# Altium PCB Science_Board_PCB.PcbDoc (part 2 of 2)
Units mil, origin at the board's own origin, x right, y up, seen from the top; angles counter-clockwise.
Board outline 6000 x 3000 mil, 4 copper layers (Top Layer, Mid Layer 1, Mid Layer 2, Bottom Layer), stack 78.937 mil thick; 225 components, 114 nets, 687 pads, 119 vias.
Unrouted connection lines stored in the file: 2.
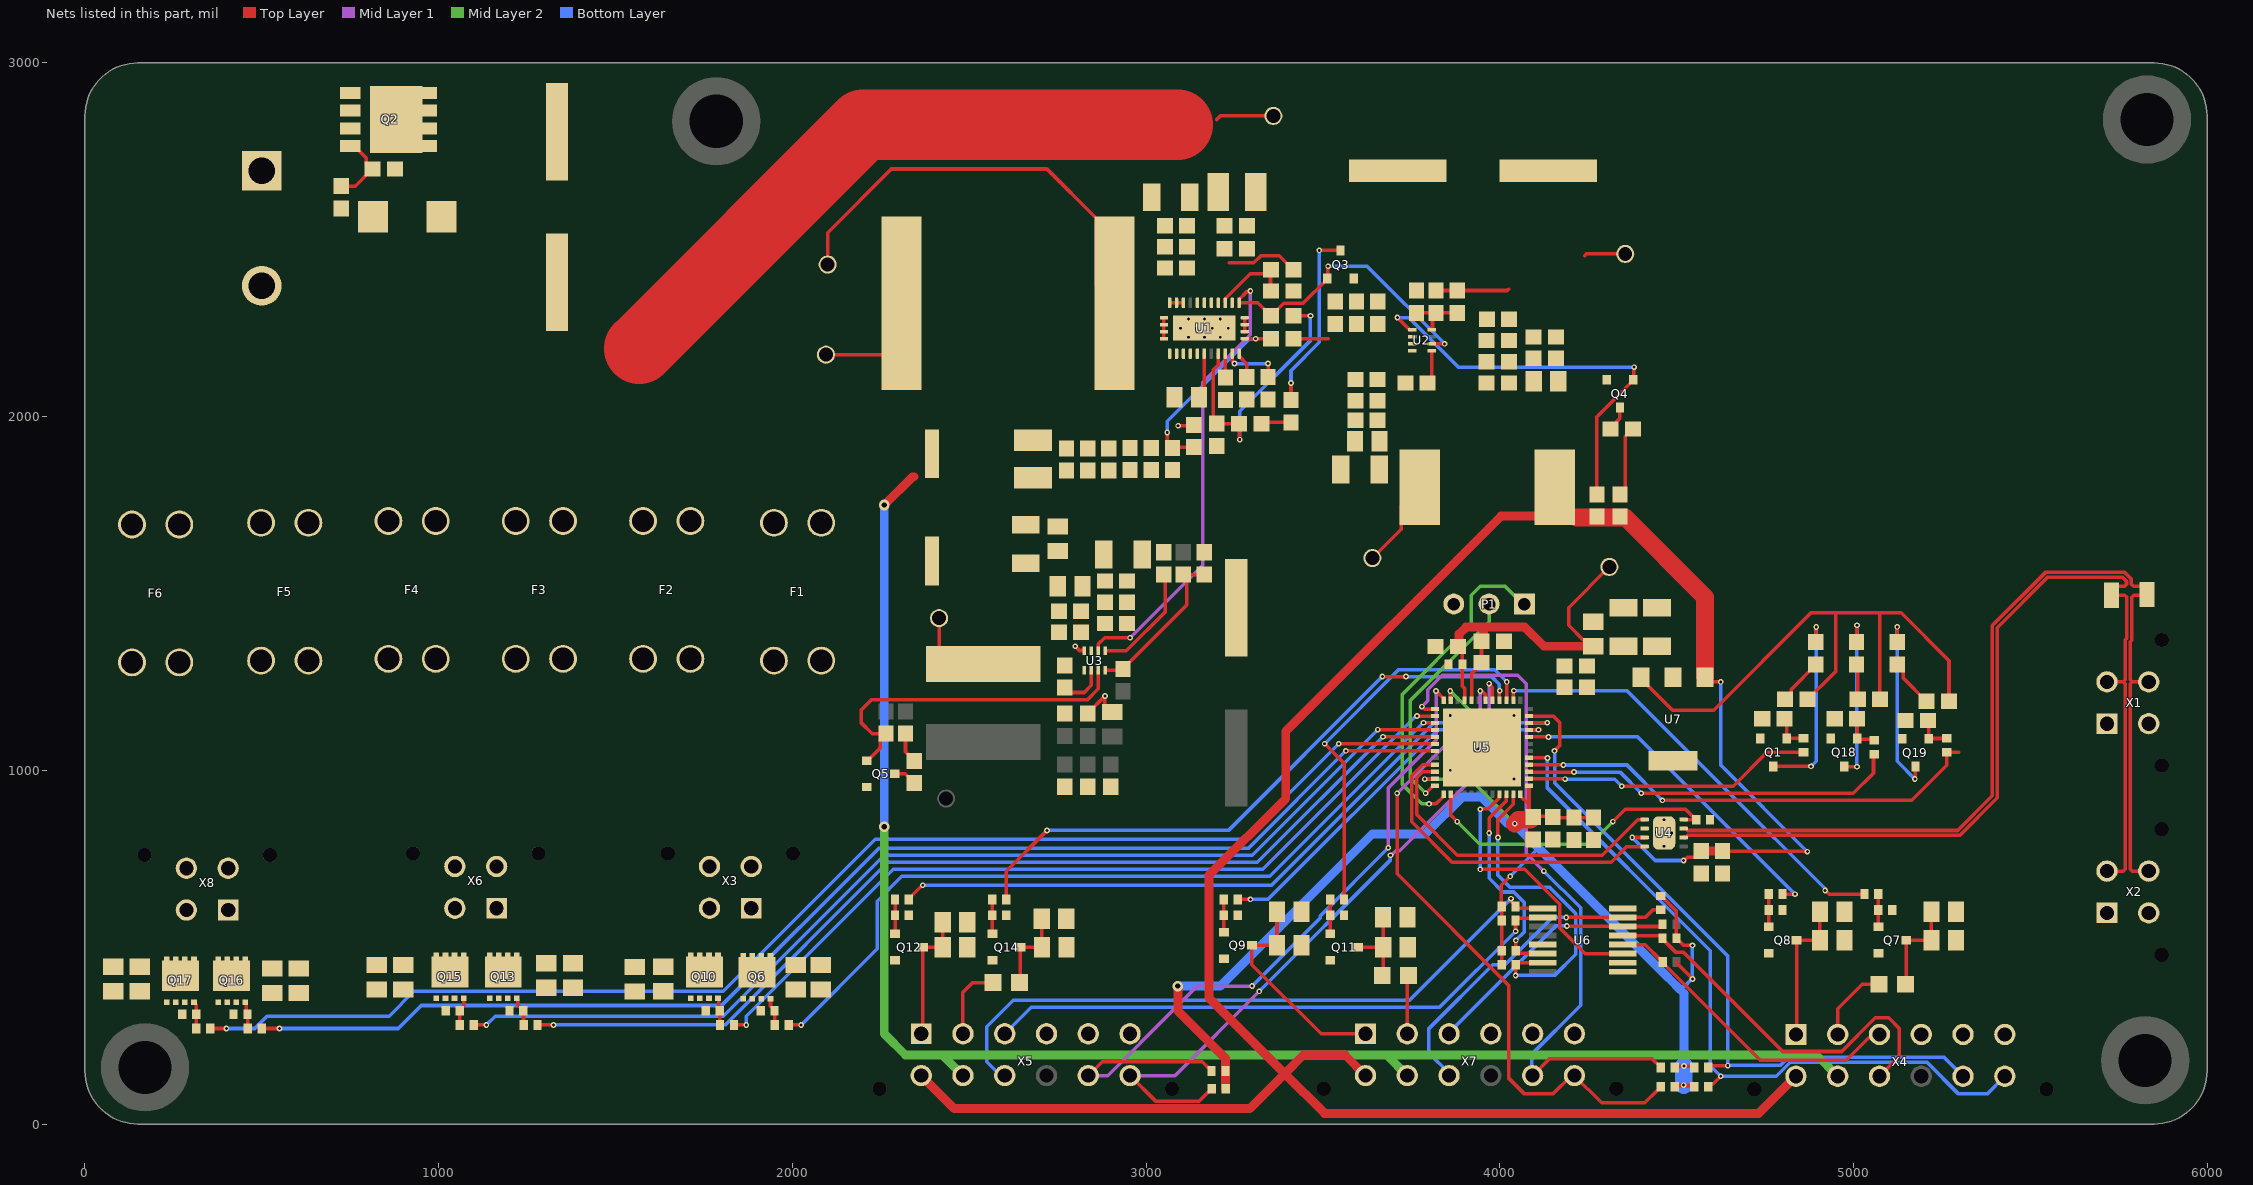
[diagram p4: the nets of this part, all layers, seen from the top]

## Via types
v1: diameter 16, hole 8, Top Layer to Bottom Layer, 101 vias
v2: diameter 11.81, hole 7.87, Top Layer to Bottom Layer, 14 vias
v3: diameter 30, hole 15, Top Layer to Bottom Layer, 4 vias

## Nets (pads, with @x,y where several pads share a name; then routed paths per layer and width w, separated by ;. In a path a pad name is that pad's centre, name@x,y a point inside that pad or via, vN(x,y) a via of type N, cw(c..) or ccw(c..) an arc to the next point about the centre after c; other vN are vias at no path point) (continued)
5V: C41.1 C42.1 C43.1 C44.1 C45.1 C46.1 C47.1 C48.1 C59.1 C60.1 C69.1 L2.2 R15.1 R17.2 R19.1 TP4.1 U4.3 U7.1 X4.P$7 X5.P$7 X7.P$7 | length 7250.4
  Top Layer w10: C41.1@3820,2356.5 R19.1@3880,2356.5 4021.5,2356.5 4025,2360 ; 4240,2455 4245,2460 TP4.1@4355,2460 ; v1(4375,810) U4.3@4409.76,810 ; v1(4520,745) 4521.62,745 4530.48,753.86 4553.35,753.86 4570,770.51 C59.1@4570,771.5 ; U7.1@4580.55,1263.11 4593.66,1250 v1(4625,1250) ; C60.1@4630,771.5 v1@4870,771.5
  Top Layer w25: X5.P$7@2364.44,136.89 2457.87,43.46 3293.46,43.46 3392.5,142.5 ; X7.P$7@3620.66,136.89 3562.55,195 3445,195 3392.5,142.5 ; L2.2@4123.86,1718.7 4003.7,1718.7 3395,1110 3395,920 3177.85,702.85 3177.85,357.15 3392.5,142.5 ; C59.1@4570,771.5 C60.1@4630,771.5 ; X4.P$7@4837.55,135 4732.55,30 3505,30 3392.5,142.5
  Top Layer w50: 4217.32,1715 4355,1715 4580.55,1489.45 U7.1@4580.55,1263.11
  Bottom Layer w10: v1(4375,810) 4440,745 v1(4520,745) ; v1(4625,1250) 4625,1015 v1(4870,770)
12V_5A_BOOT: C19.2 U1.6 | length 129.5
  Top Layer w10: C19.2@3149.65,2055 3165,2070.35 U1.6@3165,2178.15
12V_5A_FB: C20.2 R9.2 R11.1 U1.12 | length 593.4
  Top Layer w10: v1(3060,1955) 3060,1926.5 R9.2@3075,1911.5 3077.01,1913.5 R11.1@3135,1913.5 R11.1@3151.65,1896.85 ; U1.12@3279.17,2220.47 3279.25,2220.39 3309.61,2220.39 v1(3310,2220) C20.2@3360,2220
  Bottom Layer w10: v1(3060,1955) 3060,1986.65 3292.2,2218.85 3308.85,2218.85 v1(3310,2220)
12V_5A_MAIN: C1.1 C2.1 C3.1 C4.2 C5.1 C6.1 C7.1 C8.2 C9.1 C11.1 C12.1 C13.1 C14.1 C15.1 C16.1 C17.1 C18.1 C20.1 C33.1 C34.1 C35.1 C36.1 C37.1 C38.1 C39.1 L1.2 R9.1 TP1.1 U2.2 U3.3 X4.P$8 X5.P$8 X7.P$8 | length 4950.9
  Top Layer w10: TP1.1@2095,2175 2257.52,2175 2309.11,2226.59 L1.2@2309.11,2320 ; C20.1@3416.5,2220 3515,2220
  Top Layer w25: v3(2260,1750) 2340,1830 2345,1830
  Mid Layer 2 w10: 2260,255 2261.62,253.38
  Mid Layer 2 w25: 2260,255 v3(2260,840) ; 2261.62,253.38 2320,195 2424.44,195 ; X5.P$8@2482.55,136.89 2424.44,195 ; X7.P$8@3738.77,136.89 3680.66,195 ; X4.P$8@4955.66,135 4895.66,195 3680.66,195 ; 2424.44,195 3680.66,195
  Bottom Layer w10: v3(2260,840) v3@2260.81,840.81
  Bottom Layer w25: v3(2260,1750) 2260,841.62 v3@2260.81,840.81
12V_5A_OUT: C30.1 U1.9 | length 68.5
  Top Layer w10: U1.9@3224.06,2178.15 3224.06,2110.94 C30.1@3225,2110
12V_5A_PG: Q3.1 R10.1 U1.16 U2.6 U3.2 | length 2091
  Top Layer w10: U3.2@2865.32,1337.56 2865.32,1356.88 2883.43,1375 v1(2955,1375) ; v1(3295,2355) 3293.85,2353.85 3285.74,2353.85 3263.43,2331.54 U1.16@3263.43,2321.85 3315.67,2321.85 3352.52,2285 R10.1@3353.5,2285 3354.49,2285 3389.49,2320 3443.94,2320 3512.6,2388.66 Q3.1@3512.6,2390.63 3513.85,2391.88 3513.85,2423.85 v1(3515,2425) ; U2.6@3807.56,2205.63 v1(3844.37,2205.63) v1@3845,2205
  Mid Layer 1 w10: v1(2955,1375) 3160,1580 3160,2096.65 3295,2231.65 v1(3295,2355)
  Bottom Layer w10: v1(3515,2425) 3625,2425 v1(3844.37,2205.63)
12V_5A_SW: C19.1 L1.1 TP3.1 U1.1 U1.2 U1.3 U1.4 U1.5 | length 1243.6
  Top Layer w10: TP3.1@2100,2430 2100,2520 2280,2700 2720,2700 2859.29,2560.71 2859.29,2371.59 L1.1@2910.89,2320
12V_5A_VCC: C21.1 R8.1 R10.2 U1.8 | length 798.5
  Top Layer w10: U1.8@3204.37,2178.15 3204.37,2146.39 3190,2132.02 3190,1990 C21.1@3200,1980 R8.1@3263.5,1980 3263.5,1936.5 v1(3265,1935) ; R10.2@3416.5,2285 3416.83,2284.67 v1@3465,2284.67
  Bottom Layer w10: v1(3265,1935) 3265,2015 3465,2215 v1@3465,2284.67
  other v1: 3465,2285
BST_3V3_BUCK: C50.1 U3.6 | length 131.6
  Top Layer w10: C50.1@2770,1233.5 2783.5,1220 2825,1220 2845.63,1240.63 U3.6@2845.63,1282.44
BST_5V_BUCK: C40.1 U2.5 | length 95.5
  Top Layer w10: C40.1@3796.5,2095 3807.56,2106.06 U2.5@3807.56,2185.94
CAN_N: R30.1 U4.6 X1.P$2 X2.P$2 | length 2834.1
  Top Layer w10: U4.6@4520,810 4525.91,810 4531.7,815.8 5300.59,815.8 5406.77,921.97 5406.77,1403.46 5548.74,1545.43 5761.02,1545.43 5772.15,1534.3 5772.15,1526.02 5766.3,1520.16 5745.47,1520.16 5729.8,1504.49 R30.1@5729.8,1495 5767.49,1495 5773.35,1489.14 5773.35,1373.5 5768.94,1369.1 5768.94,1255.86 5763.09,1250 ; X2.P$2@5716.89,715 5763.09,715 5768.94,720.86 5768.94,1244.14 5763.09,1250 ; X1.P$2@5716.89,1250 5763.09,1250
CAN_P: R30.2 U4.7 X1.P$4 X2.P$4 | length 2857.3
  Top Layer w10: U4.7@4520,835.59 4525.91,835.59 4531.7,829.8 5294.8,829.8 5392.77,927.77 5392.77,1409.26 5542.95,1559.43 5766.82,1559.43 5786.15,1540.1 5786.15,1526.02 5792.01,1520.16 5814.53,1520.16 5830.2,1504.49 R30.2@5830.2,1496.69 5828.51,1495 5793.21,1495 5787.35,1489.14 5787.35,1367.7 5782.94,1363.3 5782.94,1255.86 5788.8,1250 ; X2.P$4@5835,715 5788.8,715 5782.94,720.86 5782.94,1244.14 5788.8,1250 ; X1.P$4@5835,1250 5788.8,1250
CAN_STB: R29.2 U4.8 U5.38 | length 875
  Top Layer w10: U5.38@3861.42,931.93 3861.42,873.58 v1(3880,855) ; v1(4320,855) 4355,890 4525.31,890 4546.54,868.78 4548.5,868.78 4554.72,862.56 4554.72,860.59 4520.59,860.59 U4.8@4520,861.18
  Mid Layer 2 w10: v1(3880,855) 3943.84,791.16 4256.16,791.16 v1(4320,855)
DEBUG_LED_0: R56.1 U5.2 | length 824.4
  Top Layer w10: U5.2@4082.87,976.22 4083.48,975.61 4184.39,975.61 v1(4185,975) ; v1(4345,955) 4660,955 4755.89,1050.89 R56.1@4858.8,1050.89
  Bottom Layer w10: v1(4185,975) 4325,975 v1(4345,955)
DEBUG_LED_1: R57.1 U5.3 | length 1078.7
  Top Layer w10: U5.3@4082.87,995.91 4083.78,995 v1(4210,995) ; v1(4400,935) 5000,935 5056.83,991.83 5056.83,1045.89 R57.1@5058.8,1045.89
  Bottom Layer w10: v1(4210,995) 4340,995 v1(4400,935)
DEBUG_LED_2: R58.1 U5.4 | length 1335.3
  Top Layer w10: U5.4@4082.87,1015.59 4179.41,1015.59 v1(4180,1015) ; v1(4460,915) 5165,915 5263.8,1013.8 R58.1@5263.8,1050.89 5298.48,1050.89
  Bottom Layer w10: v1(4180,1015) 4360,1015 v1(4460,915)
FB_3V3_BUCK: C51.2 R25.2 R26.1 U3.8 | length 453.2
  Top Layer w10: U3.8@2885,1282.44 2930.94,1282.44 C51.2@2935,1286.5 2935,1287.48 3115,1467.48 3115,1553.5 R26.1@3175,1553.5
FB_5V_BUCK: C41.2 R19.2 R20.1 U2.8 | length 165.9
  Top Layer w10: R20.1@3755,2293.5 C41.2@3810,2293.5 ; U2.8@3807.56,2245 3809.92,2245 3810,2245.08 C41.2@3810,2293.5 ; R19.2@3870,2293.5 C41.2@3810,2293.5
FDCAN_RX: U4.4 U5.33 | length 933.6
  Top Layer w10: U5.33@3817.13,1015.59 3782.34,1015.59 3751,984.25 3751,854.2 3865.2,740 4315,740 4359.41,784.41 U4.4@4409.76,784.41
FDCAN_TX: U4.1 U5.34 | length 897.1
  Top Layer w10: U5.34@3817.13,995.91 3782.45,995.91 3765,978.45 3765,875 3880,760 4290,760 4390.28,860.28 4408.86,860.28 U4.1@4409.76,861.18
GND: C1.2 C2.2 C3.2 C4.1 C5.2 C6.2 C7.2 C8.1 C9.2 C11.2 C12.2 C13.2 C14.2 C15.2 C16.2 C17.2 C18.2 C21.2 C22.2 C23.2 C24.2 C25.2 C26.2 C27.2 C28.2 C29.2 C30.2 C31.2 C33.2 C34.2 C35.2 C36.2 C37.2 C38.2 C39.2 C42.2 C43.2 C44.2 C45.2 C46.2 C47.2 C48.2 C52.2 C53.2 C54.2 C55.2 C56.2 C57.2 C58.2 C59.2 C60.2 C61.2 C62.2 C63.2 C64.2 C65.2 C66.2 C67.2 C68.2 C69.2 C70.2 C71.2 C72.2 C73.1 C74.2 C75.2 C76.2 C77.2 C78.2 C79.2 C80.2 C81.2 C82.2 C83.2 C84.2 C85.2 C86.2 C87.2 C88.2 C89.2 C90.2 C91.2 C92.2 C93.2 C94.2 C95.2 C96.2 C97.2 C98.2 D2.2 P1.3 Q1.2 Q2.3 Q3.2 Q4.2 Q5.2 Q6.2 Q7.2 Q8.2 Q9.2 Q10.2 Q11.2 Q12.2 Q13.2 Q14.2 Q15.2 Q16.2 Q17.2 Q18.2 Q19.2 R3.2 R7.1 R11.2 R13.1 R14.2 R20.2 R26.2 R29.1 R34.2 R35.2 R36.2 R40.2 R41.2 R42.2 R45.2 R47.2 R48.2 R50.2 R52.2 R54.2 R59.2 R60.2 R61.2 U1.13 U1.14 U1.15 U1.17 U1.19 U1.24 U1.25 U1.26 U1.27 U1.28 U1.29 U1.30 U1.31 U2.4 U3.4 U4.2 U4.9 U5.49 U6.1 U6.2 U6.8 U6.13 U7.2 X1.P$1 X1.P$3 X2.P$1 X2.P$3 X4.P$4 X4.P$5 X4.P$6 X5.P$4 X5.P$5 X5.P$6 X7.P$4 X7.P$5 X7.P$6 | length 353.6
  Top Layer w10: v1(2800.06,1350.51) 2811.8,1338.76 2825.87,1338.76 2825.94,1338.68 U3.4@2825.94,1337.56 ; C55.2@2835,1160 2835,1160.98 v1(2884.02,1210) 2884.02,1182.48 2901.85,1164.65 C53.2@2905,1164.65 ; C39.2@2947.48,1415 C39.2@2960,1415 ; U1.30@3050.83,2220.47 U1.29@3050.83,2240.16 U1.28@3050.83,2259.84 U1.27@3050.83,2279.53 ; U1.26@3066.57,2321.85 U1.25@3086.26,2321.85 U1.24@3105.94,2321.85 ; v1(3090.82,1974.18) 3132.68,1974.18 R11.2@3135,1976.5 ; U1.13@3279.17,2240.16 U1.14@3279.17,2259.84 U1.15@3279.17,2279.53
  other v1: 4040,975 3860,1000 3940,1060 3860,1155 4040,1155
  other v2: 4464.88,785.39 4486.54,822.8 4443.23,824.76 4464.88,860.2 3120.12,2224.41 3165,2224.41 3209.88,2224.41 3097.68,2250 3142.56,2250 3187.44,2250 3232.32,2250 3120.12,2275.59 3165,2275.59 3209.88,2275.59
HEATER_B0_GND: C83.1 C84.1 Q10.3 X3.P$2
HEATER_B1_GND: C93.1 C94.1 Q15.3 X6.P$2
HEATER_B2_GND: C97.1 C98.1 Q17.3 X8.P$2
HEATER_N0_GND: C75.1 C76.1 Q6.3 X3.P$1
HEATER_N1_GND: C89.1 C90.1 Q13.3 X6.P$1
HEATER_N2_GND: C95.1 C96.1 Q16.3 X8.P$1
I2C_MUX_RST: U5.45 U6.3 | length 788.8
  Top Layer w10: v1(3945,720) 4070.87,720 4169.29,621.58 4169.29,576.17 4169.29,554.06 4241.74,481.61 U6.3@4348.2,481.61 ; v1(3945,890) 3945.94,890.94 3968,890.94 3994.43,917.37 3998.31,921.25 3998.31,931.02 U5.45@3999.21,931.93
  Bottom Layer w10: v1(3945,720) v1(3945,890)
MCU_SCL: R28.1 U5.46 U6.14 | length 607.8
  Top Layer w10: v1(3970,822.94) 3970,865 4017.99,912.99 4017.99,931.02 U5.46@4018.9,931.93 ; R28.1@4045,490 4045.41,490.41 4045.41,518.76 v1(4045.82,519.18) ; R28.1@4046.69,483.31 4120.1,483.31 U6.14@4121.8,481.61
  Bottom Layer w10: v1(3970,822.94) 3970,695 4009.06,655.94 4039.9,655.94 4070,625.84 4070,543.35 v1(4045.82,519.18)
MCU_SDA: R27.1 U5.47 U6.15 | length 930.8
  Top Layer w10: v1(3995,810) 3995,860 4038.58,903.58 U5.47@4038.58,931.93 ; v1(4045,420) R27.1@4045,450 4045,450.17 4050.86,456.02 U6.15@4121.8,456.02
  Bottom Layer w10: v1(3995,810) 3995,703.35 4028.42,669.94 4140.06,669.94 4215,595 4215,480 4155,420 v1(4045,420)
NetC31_1: C31.1 U1.11 | length 76.9
  Top Layer w10: U1.11@3263.43,2178.15 3263.43,2168.46 3263.5,2168.39 3265.75,2168.39 3285,2149.13 C31.1@3285,2111.5
NetC77_1: C77.1 C78.1 Q7.3 R4.1 | length 271.8
  Top Layer w10: R4.1@5147.4,395 5149.37,396.97 Q7.3@5149.37,520 C77.1@5220.35,520 C78.1@5220.35,595
NetC79_1: C79.1 C80.1 Q8.3 | length 413.6
  Top Layer w10: 4837.55,253.11 4839.37,254.93 Q8.3@4839.37,520 C80.1@4905.35,520 C79.1@4905.35,600
NetC81_1: C81.1 C82.1 Q9.3 | length 628.2
  Top Layer w10: C81.1@3370.35,600 C82.1@3370.35,505 ; C82.1@3370.66,505 C82.1@3370.35,505 ; 3624.37,258.71 3620.66,255 3495,255 3299.37,450.63 Q9.3@3299.37,505 C82.1@3370.35,505
NetC85_1: C85.1 C86.1 Q11.3 R6.1 | length 237.8
  Top Layer w10: Q11.3@3599.37,500 C85.1@3670.71,500 ; R6.1@3667.6,420 3670.71,423.11 C85.1@3670.71,500 ; C86.1@3670.35,585 3670.71,584.65 C85.1@3670.71,500
NetC87_1: C87.1 C88.1 Q12.3 | length 373
  Top Layer w10: 2364.44,255 2369.37,259.93 Q12.3@2369.37,500 C88.1@2425.35,500 C87.1@2425.35,570
NetC91_1: C91.1 C92.1 Q14.3 R16.1 | length 241.9
  Top Layer w10: R16.1@2642.4,400 2645,402.6 Q14.3@2645,500 C92.1@2705.71,500 2705.35,500.35 C91.1@2705.35,580
NetD1_1: D1.1 R1.2 | length 158.5
  Top Layer w10: R1.2@4790.65,1217.22 R1.2@4807.3,1200.57 4808.29,1200.57 4824.94,1217.22 4824.94,1229.23 4893.8,1298.09 D1.1@4893.8,1299.07
NetD1_2: D1.2 Q1.3 | length 550.1
  Top Layer w10: Q1.3@4773.8,1011 v1(4880.34,1011) ; D1.2@4893.8,1362.07 v1@4893.8,1405.57
  Bottom Layer w10: v1(4880.34,1011) 4895,1025.66 v1(4895,1405)
NetD3_1: D3.1 R8.2 | length 85
  Top Layer w10: R8.2@3326.5,1980 3330,1983.5 D3.1@3410,1983.5
NetD3_2: D3.2 Q3.3 | length 516.9
  Top Layer w10: D3.2@3410,2046.5 v1(3410,2095) ; v1(3490,2470) 3490.32,2469.68 3549.69,2469.68 Q3.3@3550,2469.37
  Bottom Layer w10: v1(3410,2095) 3410,2130 3490,2210 v1(3490,2470)
NetD4_1: D4.1 R15.2 | length 198
  Top Layer w10: R15.2@4340,1780 4355,1795 4355,1944.49 4371.5,1960.98 D4.1@4371.5,1965
NetD4_2: D4.2 Q4.3 | length 74.3
  Top Layer w10: D4.2@4308.5,1965 4309.49,1965 4340,1995.51 Q4.3@4340,2025.63
NetD5_1: D5.1 R21.1 | length 87.4
  Top Layer w10: R21.1@2320,1103.5 2320,1052.48 2345,1027.48 D5.1@2345,1026.5
NetD5_2: D5.2 Q5.3 | length 67.2
  Top Layer w10: Q5.3@2289.37,990 2319.49,990 2345,964.49 D5.2@2345,963.5
NetD6_1: D6.1 R2.2 | length 100
  Top Layer w10: D6.1@5008.8,1299.07 5012.3,1295.57 R2.2@5012.3,1200.57
NetD6_2: D6.2 Q18.3 | length 485
  Top Layer w10: Q18.3@4973.8,1011 4974.3,1010.5 5009.5,1010.5 v1(5010,1010) ; D6.2@5008.8,1362.07 5010,1363.27 v1(5010,1410)
  Bottom Layer w10: v1(5010,1010) v1(5010,1410)
NetD7_1: D7.1 R55.2 | length 164.2
  Top Layer w10: D7.1@5107.15,1281.44 5123.8,1298.09 D7.1@5123.8,1299.07 5140.45,1282.42 5140.45,1261.44 5206.32,1195.57 R55.2@5207.3,1195.57 R55.2@5208.29,1195.57
NetD7_2: D7.2 Q19.3 | length 529.8
  Top Layer w10: D7.2@5123.8,1362.07 v1(5123.8,1405.57) ; v1@5174.64,975.57 5174.64,1009.96 Q19.3@5175.49,1010.81
  Bottom Layer w10: v1(5123.8,1405.57) 5123.8,1025.57 v1(5173.8,975.57)
NetF1_2: F1.2 X3.P$3
NetF2_2: F2.2 X3.P$4
NetF3_2: F3.2 X6.P$3
NetF4_2: F4.2 X6.P$4
NetF5_2: F5.2 X8.P$3
NetF6_2: F6.2 X8.P$4
NetJ2_1: J2.1 Q2.2
NetQ1_1: Q1.1 R56.2 R59.1 | length 106.1
  Top Layer w10: R59.1@4805.3,1145.57 4811.2,1139.67 Q1.1@4811.2,1089.74 4811.46,1090 4858.54,1090 R56.2@4858.8,1090.26
NetQ2_1: Q2.1 R5.2 R7.2 | length 206.4
  Top Layer w10: R5.2@725,2651.5 764.02,2651.5 R7.2@812.52,2700 ; Q2.1@750,2765 761.81,2765 795.87,2730.94 795.87,2716.65 R7.2@812.52,2700 ; R7.2@813.5,2700 R7.2@812.52,2700
NetQ4_1: Q4.1 R17.1 U2.1 | length 1187.7
  Top Layer w10: v1@3710,2280 v1(3710.71,2280) 3745.71,2245 U2.1@3752.44,2245 ; R17.1@4275,1780 4275,2000 4378.85,2103.85 4378.85,2138.85 v1(4380,2140)
  Bottom Layer w10: v1(3710.71,2280) 3743.35,2280 3883.35,2140 v1(4380,2140)
NetQ5_1: Q5.1 R22.1 U3.7 | length 966.1
  Top Layer w10: Q5.1@2210.63,1027.4 2212.6,1027.4 2248.35,1063.15 2248.35,1086.85 R22.1@2265,1103.5 2225.98,1103.5 2194.35,1135.14 2194.35,1169.35 2225,1200 2835,1200 2865.32,1230.32 U3.7@2865.32,1282.44
NetQ6_1: Q6.1 R31.2 R34.1 | length 78.9
  Top Layer w10: Q6.1@1938.39,353.98 1938.39,333.27 1949.68,321.97 R34.1@1949.68,320 1950,319.69 1950,280.31 R31.2@1950.32,280
NetQ7_1: Q7.1 R32.2 R35.1 | length 97.7
  Top Layer w10: R32.2@5070.47,654.84 5070.47,610 5070.47,557.56 Q7.1@5070.63,557.4 ; R32.2@5070.79,645.16 R32.2@5070.94,645
NetQ8_1: Q8.1 R33.2 R36.1 | length 97.6
  Top Layer w10: Q8.1@4760.63,557.4 4760.63,610 R33.2@4760.63,655
NetQ9_1: Q9.1 R37.2 R40.1 | length 92.7
  Top Layer w10: R37.2@3220.32,635 3220.47,634.84 3220.47,590 3220.47,542.56 Q9.1@3220.63,542.4
NetQ10_1: Q10.1 R38.2 R41.1 | length 77.3
  Top Layer w10: Q10.1@1790,355 1792.34,352.66 1792.34,322.34 R41.1@1794.68,320 1795.16,319.53 1795.16,280.47 R38.2@1795.63,280
NetQ11_1: Q11.1 R39.2 R42.1 | length 97.6
  Top Layer w10: Q11.1@3520.63,537.4 R39.2@3520.63,635
NetQ12_1: Q12.1 R43.2 R45.1 | length 97.7
  Top Layer w10: R43.2@2290.32,635 2290.47,634.84 2290.47,537.56 Q12.1@2290.63,537.4
NetQ13_1: Q13.1 R44.2 R47.1 | length 82.9
  Top Layer w10: Q13.1@1221.18,355 1224.06,352.13 1224.06,337.6 1239.68,321.97 R47.1@1239.68,320 1240,319.69 1240,280.31 R44.2@1240.32,280
NetQ14_1: Q14.1 R46.2 R48.1 | length 98
  Top Layer w10: R46.2@2565.32,635 2565.79,634.53 2565.79,537.87 Q14.1@2566.26,537.4
NetQ15_1: Q15.1 R49.2 R50.1 | length 79.5
  Top Layer w10: R49.2@1060,280 1059.84,280.16 1059.84,322.13 1070.59,332.87 Q15.1@1070.59,355
NetQ16_1: Q16.1 R51.2 R52.1 | length 77
  Top Layer w10: Q16.1@453.39,343.98 456.26,341.1 456.26,313.43 R52.1@459.69,310 460.16,309.53 460.16,270.47 R51.2@460.63,270
NetQ17_1: Q17.1 R53.2 R54.1 | length 76.7
  Top Layer w10: Q17.1@308.39,343.98 314.84,337.52 314.84,270.16 R53.2@315,270
NetQ18_1: Q18.1 R57.2 R60.1 | length 105.7
  Top Layer w10: R60.1@5010.3,1145.57 5011.2,1144.67 Q18.1@5011.2,1089.74 5013.44,1087.5 5056.56,1087.5 R57.2@5058.8,1085.26
NetQ19_1: Q19.1 R58.2 R61.1 | length 103.3
  Top Layer w10: R61.1@5210.3,1140.57 5212.89,1137.97 Q19.1@5212.89,1089.55 5213.25,1089.9 5263.44,1089.9 R58.2@5263.8,1090.26
NetR3_1: R3.1 U3.1 | length 321
  Top Layer w10: U3.1@2885,1337.56 2944.21,1337.56 3055,1448.35 R3.1@3055,1553.5
NetR12_1: R12.1 R14.1 U1.18 | length 231.4
  Top Layer w10: U1.18@3224.06,2321.85 U1.18@3224.06,2321.85 3224.13,2333.22 3294.52,2403.6 R12.1@3350,2403.6 ; R14.1@3352.01,2345 R12.1@3352.01,2403.6 ; R12.1@3353.5,2408.6 R12.1@3353.5,2415
NetR13_2: R13.2 U1.10 | length 164.2
  Top Layer w10: U1.10@3243.74,2178.15 3243.82,2178.07 3243.82,2156.18 v1(3250,2150) ; R13.2@3345,2111.5 v1(3345,2150)
  Bottom Layer w10: v1(3250,2150) v1(3345,2150)
NetR31_1: R31.1 U5.27 | length 2260.8
  Top Layer w10: R31.1@1989.68,280 v1(2025,280) ; v1@3784.35,1134.35 3816.48,1134.35 U5.27@3817.13,1133.7
  Bottom Layer w10: v1(2025,280) 2240,495 2240,630.2 2309.8,700 3350,700 v1(3784.35,1134.35)
NetR32_1: R32.1 U5.14 | length 1260.3
  Top Layer w10: U5.14@4038.58,1197.68 4038.58,1223.58 v1(4040,1225) ; v1(4920,660) 4921.62,660 4931.62,650 R32.1@5031.26,650
  Bottom Layer w10: v1(4040,1225) 4360,1225 4639.43,945.57 4918.85,666.15 4918.85,661.15 v1(4920,660)
NetR38_1: R38.1 U5.26 | length 2358.3
  Top Layer w10: R38.1@1835,280 v1(1870,280) ; v1@3766.15,1153.39 U5.26@3817.13,1153.39
  Bottom Layer w10: v1(1870,280) 1870,305 2285,720 3330,720 v1@3765.16,1155.16
  other v1: 3766.15,1153.63
NetR39_1: R39.1 U5.15 | length 1131.1
  Top Layer w10: v1(3505,1075) 3560,1020 R39.1@3560,635 ; U5.15@4018.9,1197.68 4019.45,1198.23 4019.45,1249.45 v1(4020,1250)
  Bottom Layer w10: v1(3505,1075) 3713.84,1283.84 3986.16,1283.84 v1(4020,1250)
NetR44_1: R44.1 U5.29 | length 2875
  Top Layer w10: R44.1@1279.68,280 v1(1325,280) ; v1@3670,1094.33 U5.29@3817.13,1094.33
  Bottom Layer w10: v1(1325,280) 1810,280 2270,740 3315,740 v1(3670,1095)
NetR46_1: R46.1 U5.16 | length 1756.9
  Top Layer w10: R46.1@2604.68,635 2604.68,714.68 v1(2720,830) ; v1(3668.35,1265) v1(3735,1265) ; U5.16@3999.21,1197.68 3999.21,1224.21 v1(4000,1225)
  Bottom Layer w10: v1(2720,830) 3233.35,830 v1(3668.35,1265) ; v1(3735,1265) 3976.65,1265 3998.85,1242.8 3998.85,1226.15 v1(4000,1225)
NetR49_1: R49.1 U5.28 | length 3065.5
  Top Layer w10: R49.1@1099.37,280 v1(1135,280) ; v1@3653.15,1114.02 U5.28@3817.13,1114.02
  Bottom Layer w10: v1(1135,280) 1160,305 1805,305 2260,760 3300,760 v1(3655,1115)
NetR51_1: R51.1 U5.31 | length 3637.3
  Top Layer w10: R51.1@500,270 v1(550,270) ; v1@3570,1054.98 U5.31@3817.13,1054.96
  Bottom Layer w10: v1(550,270) 885.81,270 950.81,335 1800,335 2245,780 3290,780 v1(3565,1055)
NetR53_1: R53.1 U5.30 | length 3796.3
  Top Layer w10: R53.1@354.37,270 v1(400,270) ; v1(3545,1075) 3545.18,1074.82 3816.95,1074.82 U5.30@3817.13,1074.65
  Bottom Layer w10: v1(400,270) 480,270 515,305 860,305 930,375 1805,375 2235,805 3275,805 v1(3545,1075)
NetR62_1: R62.1 U6.4 X4.P$3 | length 888
  Top Layer w10: U6.4@4348.2,507.2 4411.05,507.2 4454.47,463.78 R62.1@4458.5,463.78 ; R62.1@4460.63,458.03 4460.63,456.06 4736.69,180 4980,180 5043.5,243.5 5064.16,243.5 X4.P$3@5073.77,253.11
NetR63_1: R63.1 U6.5 X4.P$9 | length 1127.4
  Top Layer w10: U6.5@4348.2,532.8 4453.5,532.8 4460.31,525.98 R63.1@4460.31,525 ; R63.1@4460.31,523.03 4498.35,485 4520,485 4800,205 4966.6,205 5061.6,300 5100,300 5130,270 5130,191.23 X4.P$9@5073.77,135
NetR64_1: R64.1 U6.6 X7.P$3 | length 735.2
  Top Layer w10: v1(4190,560) 4190.81,559.19 4347.4,559.19 U6.6@4348.2,558.39 4453.7,558.39 R64.1@4460.31,565
  Bottom Layer w10: X7.P$3@3856.88,255 3856.88,258.53 4158.35,560 v1(4190,560)
NetR65_1: R65.1 U6.7 X7.P$9 | length 950.4
  Top Layer w10: v1(4188.13,583.98) 4411.48,583.98 4432.5,605 ; 4432.5,605.32 R65.1@4455,605.32
  Bottom Layer w10: X7.P$9@3856.88,136.89 3856.88,143.12 3800,200 3800,270 3980.03,450.03 4015.03,450.03 4148.98,583.98 v1(4188.13,583.98)
NetR66_1: R66.1 U6.9 X5.P$9 | length 1903.8
  Top Layer w10: v1(4032.09,637.09) 4033.24,635.95 4033.24,628.41 4044.68,616.97 R66.1@4044.68,615 ; R66.1@4046.2,616.52 4053.15,609.57 U6.9@4121.8,609.57
  Bottom Layer w10: X5.P$9@2600.66,136.89 2588.97,136.89 2550,175.86 2550,275 2625,350 3745,350 v1(4032.09,637.09)
NetR67_1: R67.1 U6.10 X5.P$3 | length 1670.5
  Top Layer w10: R67.1@4044.68,575 4044.68,545.32 v1(4045,545) ; R67.1@4046.67,581.99 4119.81,581.99 U6.10@4121.8,583.98
  Bottom Layer w10: X5.P$3@2600.66,255 2675.66,330 3830,330 v1(4045,545)
SW_3V3_BUCK: C50.2 L3.1 TP6.1 U3.5 | length 227.7
  Top Layer w10: TP6.1@2415,1430 2415,1346.42 2461.18,1300.24 L3.1@2540,1300.24
SW_5V_BUCK: C40.2 L2.1 TP5.1 U2.3 | length 255.5
  Top Layer w10: TP5.1@3640,1600 3721.97,1681.97 3721.97,1747.91 L2.1@3774.06,1800
SWCLK: P1.1 U5.37 | length 952.5
  Top Layer w10: v1(3800,905) 3819.72,905 3841.73,927.01 U5.37@3841.73,931.93
  Mid Layer 2 w10: v1(3800,905) 3799.76,905.24 3779.76,905.24 3725,960 3725,1215 3920,1410 3920,1495 3945,1520 4015,1520 P1.1@4070,1465
SWDIO: P1.2 U5.36 | length 676.3
  Top Layer w10: v1@3790,935 v1(3790.67,935) 3812.2,956.54 U5.36@3817.13,956.54
  Mid Layer 2 w10: v1(3790.67,935) 3747.3,978.37 3747.3,1197.3 3970,1420 P1.2@3970,1465
THERM_B0: R69.1 U5.11 X4.P$11 | length 2027.8
  Top Layer w10: U5.11@4082.87,1153.39 4151.61,1153.39 4170,1135 4170,1070 v1(4155,1055) ; R69.1@4589.69,160 4594.69,165 v1(4645,165)
  Bottom Layer w10: v1(4155,1055) 4155,965 4644.88,475.12 4644.88,165.12 v1(4645,165) ; v1@4644.88,166.74 4645.48,166.15 4650.39,166.15 4650.98,166.74 4794.17,166.74 4815.55,188.12 5256.88,188.12 X4.P$11@5310,135
THERM_B1: R71.1 U5.25 X7.P$11 | length 2024.7
  Top Layer w10: v1(3780,1180) 3781.62,1180 3788.55,1173.07 U5.25@3817.13,1173.07 ; X7.P$11@4093.11,136.89 4141.22,185 4430.31,185 R71.1@4455.31,160
  Mid Layer 1 w10: v1(3780,1180) 3796.67,1196.67 3796.67,1227.65 3837.86,1268.84 4051.16,1268.84 4075,1245 4075,765 v1(4125,715) v1@4125,713.38
  Bottom Layer w10: X7.P$11@4093.11,136.89 4090,140 4090,196.57 4229,335.57 4229,611 v1(4125,715)
THERM_B2: R73.1 U5.24 X5.P$11 | length 2029.5
  Top Layer w10: X5.P$11@2836.89,136.89 2876.01,176.01 3159.3,176.01 R73.1@3185.32,150 ; v1@3820,1225 v1(3820,1224.33) 3841.73,1202.6 U5.24@3841.73,1197.68
  Mid Layer 1 w10: X5.P$11@2836.89,136.89 2891.89,136.89 2971,216 2971.15,216 2994,238.85 2994,239 3145,390 v1(3300,390) ; v1(3685,780.96) 3685,950 3820,1085 v1(3820,1224.33)
  Bottom Layer w10: v1(3300,390) 3492.21,582.21 3492.21,588.17 v1(3685,780.96)
THERM_N0: R68.1 U5.5 X4.P$12 | length 2081
  Top Layer w10: U5.5@4082.87,1035.28 4083.01,1035.14 4134.86,1035.14 v1(4135,1035) ; R68.1@4589.69,105 4589.69,106.97 4596.5,113.78 4603.78,113.78 v1(4625,135)
  Bottom Layer w10: v1(4135,1035) 4135,950 4595,490 4595,165 v1(4625,135) 4782.23,135 4821.35,174.12 5208.09,174.12 5297.21,85 5378.11,85 X4.P$12@5428.11,135
THERM_N1: R70.1 U5.18 X7.P$12 | length 1879.4
  Top Layer w10: v1(3710,935) 3710,707.31 4025,392.31 4025,130 4070,85 4150,85 4201.89,136.89 X7.P$12@4211.22,136.89 4288.11,60 4410.31,60 4446.54,96.22 4448.5,96.22 4455.31,103.03 R70.1@4455.31,105 ; v1(3945,1224.33) 3946.15,1223.18 3950.19,1223.18 3958.94,1214.44 3958.94,1198.58 U5.18@3959.84,1197.68
  Mid Layer 1 w10: v1(3710,935) 3945,1170 v1(3945,1224.33)
THERM_N2: R72.1 U5.17 X5.P$12 | length 1938.3
  Top Layer w10: X5.P$12@2955,136.89 3026.93,64.96 3150.59,64.96 3176.85,91.22 3178.82,91.22 3185.63,98.03 R72.1@3185.63,100 ; v1(3970,1245) 3970,1243.38 3979.53,1233.85 U5.17@3979.53,1197.68
  Mid Layer 1 w10: X5.P$12@2955,136.89 3081.89,136.89 v1(3320,375) ; v1(3691.16,760) 3692.78,760 3705.66,772.88 3717.88,772.88 3970,1025 v1(3970,1245)
  Bottom Layer w10: v1(3320,375) 3690.01,745.01 3690.01,758.85 v1(3691.16,760)
UV_LED_0: R33.1 U5.8 | length 971.5
  Top Layer w10: U5.8@4082.87,1094.33 v1(4138.14,1094.33) ; R33.1@4799.69,650 v1(4835,650)
  Bottom Layer w10: v1(4138.14,1094.33) 4390.67,1094.33 v1(4835,650)
UV_LED_0_GND: X4.P$1
UV_LED_1: R37.1 U5.9 | length 1078.4
  Top Layer w10: R37.1@3259.68,636.97 R37.1@3259.68,635 v1(3295,635) ; U5.9@4082.87,1114.02 4083.3,1114.44 4109.44,1114.44 v1(4109.86,1114.86)
  Bottom Layer w10: v1(3295,635) 3345,635 3825,1115 4109.72,1115 v1(4109.86,1114.86)
UV_LED_1_GND: X7.P$1
UV_LED_2: R43.1 U5.10 | length 2066.5
  Top Layer w10: R43.1@2329.68,635 2329.68,636.97 2367.72,675 v1(2368.86,675) v1@2370,675 ; U5.10@4082.87,1133.7 4083.3,1134.12 4134.12,1134.12 v1(4134.54,1134.54)
  Bottom Layer w10: v1(2368.86,675) 3355,675 3815,1135 4134.09,1135 v1(4134.54,1134.54)
UV_LED_2_GND: X5.P$1
VBAT: C22.1 C23.1 C24.1 C25.1 C26.1 C27.1 C28.1 C29.1 D2.1 F1.1 F2.1 F3.1 F4.1 F5.1 F6.1 J2.2 R5.1 R12.2 TP2.1 U1.20 U1.21 U1.22 | length 2155.5
  Top Layer w10: 3200,2840 3210,2850 TP2.1@3360,2850 ; 3235,2435 3305,2435 3325,2455 3376.5,2455 3398.86,2432.64 3398.86,2431.65 3415.51,2415 R12.2@3416.5,2415
  Top Layer w200: 1567.54,2192.54 2200,2825 3090,2825
VBAT_MCU: C61.1 C62.1 C63.1 C64.1 C65.1 C66.1 C67.1 C68.1 C70.1 C71.1 C72.1 C73.2 C74.1 R1.1 R2.1 R27.2 R28.2 R55.1 R63.2 R65.2 R66.2 R67.2 R68.2 R69.2 R70.2 R71.2 R72.2 R73.2 TP8.1 U5.1 U5.20 U5.21 U5.23 U5.35 U5.48 U7.3 | length 7192.8
  Top Layer w10: v1@3788.19,976.22 U5.35@3817.13,976.22 ; v1(3860,1224.33) 3860.71,1223.62 3860.71,1198.39 U5.23@3861.42,1197.68 ; C67.1@3881.5,1350 C67.1@3883.25,1351.75 ; C67.1@3885,1353.5 C67.1@3883.25,1351.75 ; C68.1@3894.68,1295 3894.68,1237.46 3900.79,1231.36 U5.21@3900.79,1197.68 ; C68.1@3894.68,1300 3894.68,1340.32 C67.1@3883.25,1351.75 ; U5.20@3920.47,1197.68 3920.47,1272.64 3947.83,1300 C66.1@3948.82,1300 ; C66.1@3948.5,1305 C65.1@3948.5,1365 C65.1@3955,1371.5 ; R27.2@4005.63,450 4005.47,450.16 4005.47,614.84 R66.2@4005.32,615 4004.76,615.55 4004.76,674.76 v1(4030,700) ; U5.48@4058.27,931.93 4058.27,927.01 4080.28,905 4082.87,905 ; C64.1@4082.87,889.17 4082.87,905 ; U5.1@4082.87,956.54 4082.87,905 ; C64.1@4087.87,870 C63.1@4140,870 ; C63.1@4140,866.3 C61.1@4260,866.3 ; C73.2@4265,1350.71 4247.17,1368.54 4236.46,1368.54 4195,1410 4195,1460 TP8.1@4310,1575 ; U7.3@4399.45,1263.11 4399.45,1259.17 4488.62,1170 4605,1170 4880,1445 4950,1445 ; R65.2@4455,644.68 4456.97,644.68 4499.69,601.97 4499.69,565 R63.2@4499.69,525 4499.69,523.03 4506.5,516.22 4508.46,516.22 4519.69,505 v1(4545,505) ; R70.2@4494.69,105 4498.54,108.85 4518.85,108.85 v1(4520,110) 4521.15,108.85 4546.46,108.85 R68.2@4550.31,105 ; R71.2@4494.69,160 4497.39,162.7 4520,162.7 v1(4521.15,163.85) 4546.46,163.85 R69.2@4550.31,160 ; 4500,458.03 4500,456.06 4545,411.06 v1(4545,410) ; R1.1@4870.3,1200.57 4871.28,1200.57 4950,1279.29 4950,1445 ; R2.1@5074.31,1200.57 5074.31,1445 ; R55.1@5270.3,1195.57 5270.3,1309.7 5135,1445 5074.31,1445 ; 4950,1445 5074.31,1445
  Top Layer w25: v3(3090,390) 3090,320 3225,185 R72.2@3225,100 ; C67.1@3885,1353.5 3885,1385 3905,1405 3955,1405 ; C65.1@3955,1371.5 3955,1405 ; C73.2@4265,1350.71 4125.18,1350.71 4070.89,1405 3955,1405
  Top Layer w50: v1(4042.37,849.28) 4053.08,860 C64.1@4087.01,860
  Mid Layer 2 w10: v1(3788.19,975) 3916.65,975 ; v1(3860,1224.33) 3860.67,1224.33 3916.65,1168.35 3916.65,975 ; v1(4042.37,849.28) 3916.65,975
  Bottom Layer w10: v1(4030,700) 4105,775 4115,775 ; 4502.5,387.5 4520.88,387.5 4543.38,410 v1(4545,410) v1(4545,505)
  Bottom Layer w25: v3(3090,390) 3210,390 3640,820 3790,820 3895,925 3947.25,925 4022.97,849.28 v1(4042.37,849.28) ; v1@4042.37,847.63 4110,780 ; 4115,775 4460,430 4498.5,391.5 4502.5,387.5 4521.15,368.85 v1(4521.15,163.85)
  Bottom Layer w50: v1(4520,110) 4520,162.7 v1(4521.15,163.85)
WHITE_LED_0_GND: R4.2 X4.P$2 | length 218.2
  Top Layer w10: X4.P$2@4955.66,253.11 4955.66,325.66 5025,395 R4.2@5072.6,395
WHITE_LED_1_GND: R6.2 X7.P$2 | length 168.6
  Top Layer w10: X7.P$2@3738.77,255 3738.77,411.37 R6.2@3747.4,420
WHITE_LED_2_GND: R16.2 X5.P$2 | length 214
  Top Layer w10: X5.P$2@2482.55,255 2482.55,372.55 2510,400 R16.2@2567.6,400
pads on no net: R62.2 R64.2 U1.7 U1.23 U2.7 U4.5 U5.6 U5.7 U5.12 U5.13 U5.19 U5.22 U5.32 U5.39 U5.40 U5.41 U5.42 U5.43 U5.44 U6.11 U6.12 X1.1 X2.1 X3.1 X4.1 X5.1 X6.1 X7.1 X8.1

## Polygon pours and split planes (outlines as drawn)
GND on Top Layer "NONET_L01_P032" (solid, shelved, pour order 32): 0,0 5995,0 5995,3000 5990,3005 15,3005
12V_5A_MAIN on Top Layer "12V_5A_MAIN_L01_P017" (solid, pour order 17): 3520,1665 3520,1875 2635,1875 2520,1990 2520,2505 2405,2620 2260,2620 2215,2575 2215,1895 2445,1665
NetF3_2 on Top Layer "NETF3_2_L01_P005" (solid, pour order 5): 1160,1390 1410,1390 1455,1345 1455,1005 1230,780 1230,710 1205,685 1135,685 1110,710 1110,1340 1110,710 1110,1340
NetF6_2 on Top Layer "NONET_L01_P001" (solid, pour order 1): 35,941.21 215,761.21 215,695 240,670 320,670 350,700 350,1350 310,1390 85,1390 35,1340
12V_5A_MAIN on Top Layer "12V_5A_MAIN_L01_P024" (solid, pour order 24): 3525,2290 3500,2265 3480,2245 3480,1925 3425,1870 3425,1665 3545,1665 3625,1745 3625,2140 3655,2170 3701.89,2220 3765,2220 3765,2231.38 3733.62,2231.38 3675,2290
3V3_BUCK_MAIN on Top Layer "3V3_BUCK_MAIN_L01_P025" (solid, pour order 25): 3285,1165 3285,900 3015,900 2930,985 2425,985 2380,1030 2380,1130 2945,1130 2980,1165
5V on Top Layer "5V_L01_P026" (solid, pour order 26): 4215,1690 4215,1990 4130,2075 4130,2250 4285,2405 4285,2735 4240,2780 4040,2780 3990,2730 3990,1775 4075,1690
VBAT_MCU on Top Layer "VBAT_MCU_L01_P027" (solid, pour order 27): 4070,890.59 4064.41,885 4050,885 4050,835 4265,835 4315,885 4315,1200 4350,1235 4425,1235 4445,1255 4445,1285 4490,1330 4490,1385 4485,1390 4250,1390 4230,1370 4230,925 4195.59,890.59
NetJ2_1 on Top Layer "NETJ2_1_L01_P028" (solid, pour order 28): 580,2665 705,2790 780,2790 780,2935 475,2935 410,2870 410,2595 445,2560 540,2560 580,2600
SW_5V_BUCK on Top Layer "SW_5V_BUCK_L01_P021" (solid, pour order 21): 3714.54,2212.69 3701.85,2200 3701.85,1687.5 3832.5,1687.5 3832.5,1987.5 3757.5,2062.5 3757.5,2117.5 3725,2150 3725,2185 3738.66,2198.66 3765,2198.66 3765,2212.69
12V_5A_MAIN on Top Layer "12V_5A_MAIN_L01_P019" (solid, pour order 19): 2850,1355 2910,1415 2910,1645 2940,1675 2935,1680 2785,1680 2775,1670 2775,1665 2792.5,1647.5 2795,1397.07 2840,1352.07 2840,1325 2850,1325
VBAT on Top Layer "VBAT_L01_P000" (solid, pour order 0): 420,2525 605,2525 700,2620 860,2620 1015,2465 1720,2465 1930,2675 1930,2120 2165,1885 2165,1645 2095,1575 110,1575 45,1645 45,2150
NetF5_2 on Top Layer "NETF5_2_L01_P002" (solid, pour order 2): 360,694 360,1335 420,1395 695,1395 725,1365 725,1005 485,765 485,720 435,670 380,670
NetF4_2 on Top Layer "NETF4_2_L01_P004" (solid, pour order 4): 1100,1335 1100,705 1080,685 1020,685 960,745 960,795 755,1000 755,1365 785,1395 1053.33,1395
NetF2_2 on Top Layer "NETF2_2_L01_P006" (solid, pour order 6): 1470,1345 1510,1385 1790,1385 1815,1360 1815,705 1790,680 1725,680 1680,725 1680,785 1470,995
NetF1_2 on Top Layer "NETF1_2_L01_P007" (solid, pour order 7): 1825,710 1825,1360 1850,1385 2150,1385 2180,1355 2180,990 1960,770 1960,715 1930,685 1850,685
HEATER_B2_GND on Top Layer "HEATER_B2_GND_L01_P008" (solid, pour order 8): 205,645 35,475 35,410 180,410 215,375 340,375 340,645
HEATER_N2_GND on Top Layer "HEATER_N2_GND_L01_P009" (solid, pour order 9): 486.88,645 656.88,475 656.88,410 511.88,410 476.88,375 351.88,375 351.88,645
HEATER_B1_GND on Top Layer "HEATER_B1_GND_L01_P010" (solid, pour order 10): 964.06,650 794.06,480 794.06,415 939.06,415 974.06,380 1099.06,380 1099.06,650
HEATER_N1_GND on Top Layer "HEATER_N1_GND_L01_P011" (solid, pour order 11): 1245.94,650 1415.94,480 1415.94,415 1270.94,415 1235.94,380 1110.94,380 1110.94,650
HEATER_B0_GND on Top Layer "HEATER_B0_GND_L01_P012" (solid, pour order 12): 1684.06,650 1514.06,480 1514.06,415 1659.06,415 1694.06,380 1819.06,380 1819.06,650
HEATER_N0_GND on Top Layer "HEATER_N0_GND_L01_P013" (solid, pour order 13): 1965.94,650 2135.94,480 2135.94,415 1990.94,415 1955.94,380 1830.94,380 1830.94,650
VBAT on Top Layer "VBAT_L01_P014" (solid, pour order 14): 3095.84,2924.13 3240.79,2924.13 3290,2870 3290,2725 3250,2685 3250,2395 3191.73,2336.73 3191.73,2305 3140,2305 3140,2340 3090,2390 3090,2635 2980,2745 2980,2813.81
12V_5A_SW on Top Layer "12V_5A_SW_L01_P015" (solid, pour order 15): 3155,2195 3050,2195 2965,2280 2965,2350 2880,2350 2855,2325 2855,2065 2905,2015 3105,2015 3115,2025 3115,2085 3155,2125
SW_3V3_BUCK on Top Layer "SW_3V3_BUCK_L01_P022" (solid, pour order 22): 2835,1295 2770,1360 2365,1360 2365,1240 2715,1240 2740,1265 2835,1265
GND on Bottom Layer "NONET_L04_P031" (solid, shelved, pour order 31): 0,0 6000,0 6000,3000 5995,2995 0,2995
GND on Mid Layer 2 "NONET_L03_P030" (solid, shelved, pour order 30): 0,0 6000,0 6000,3000 5995,2995 0,2995
GND on Mid Layer 1 "NONET_L02_P029" (solid, shelved, pour order 29): 0,0 6000,0 6000,3000 5995,2995 0,2995

## Silkscreen, mask and mechanical layers (free items; w line width, h text height)
Board Outline:
  the board outline again, w10